# Altium PCB PCB Raspberry PI 3 en adelante.PcbDoc
Units mm, origin at the board's own origin, x right, y up, seen from the top; angles counter-clockwise.
Board outline 66 x 45 mm, 2 copper layers (Top Layer, Bottom Layer); 11 components, 24 nets, 90 pads, 34 vias.
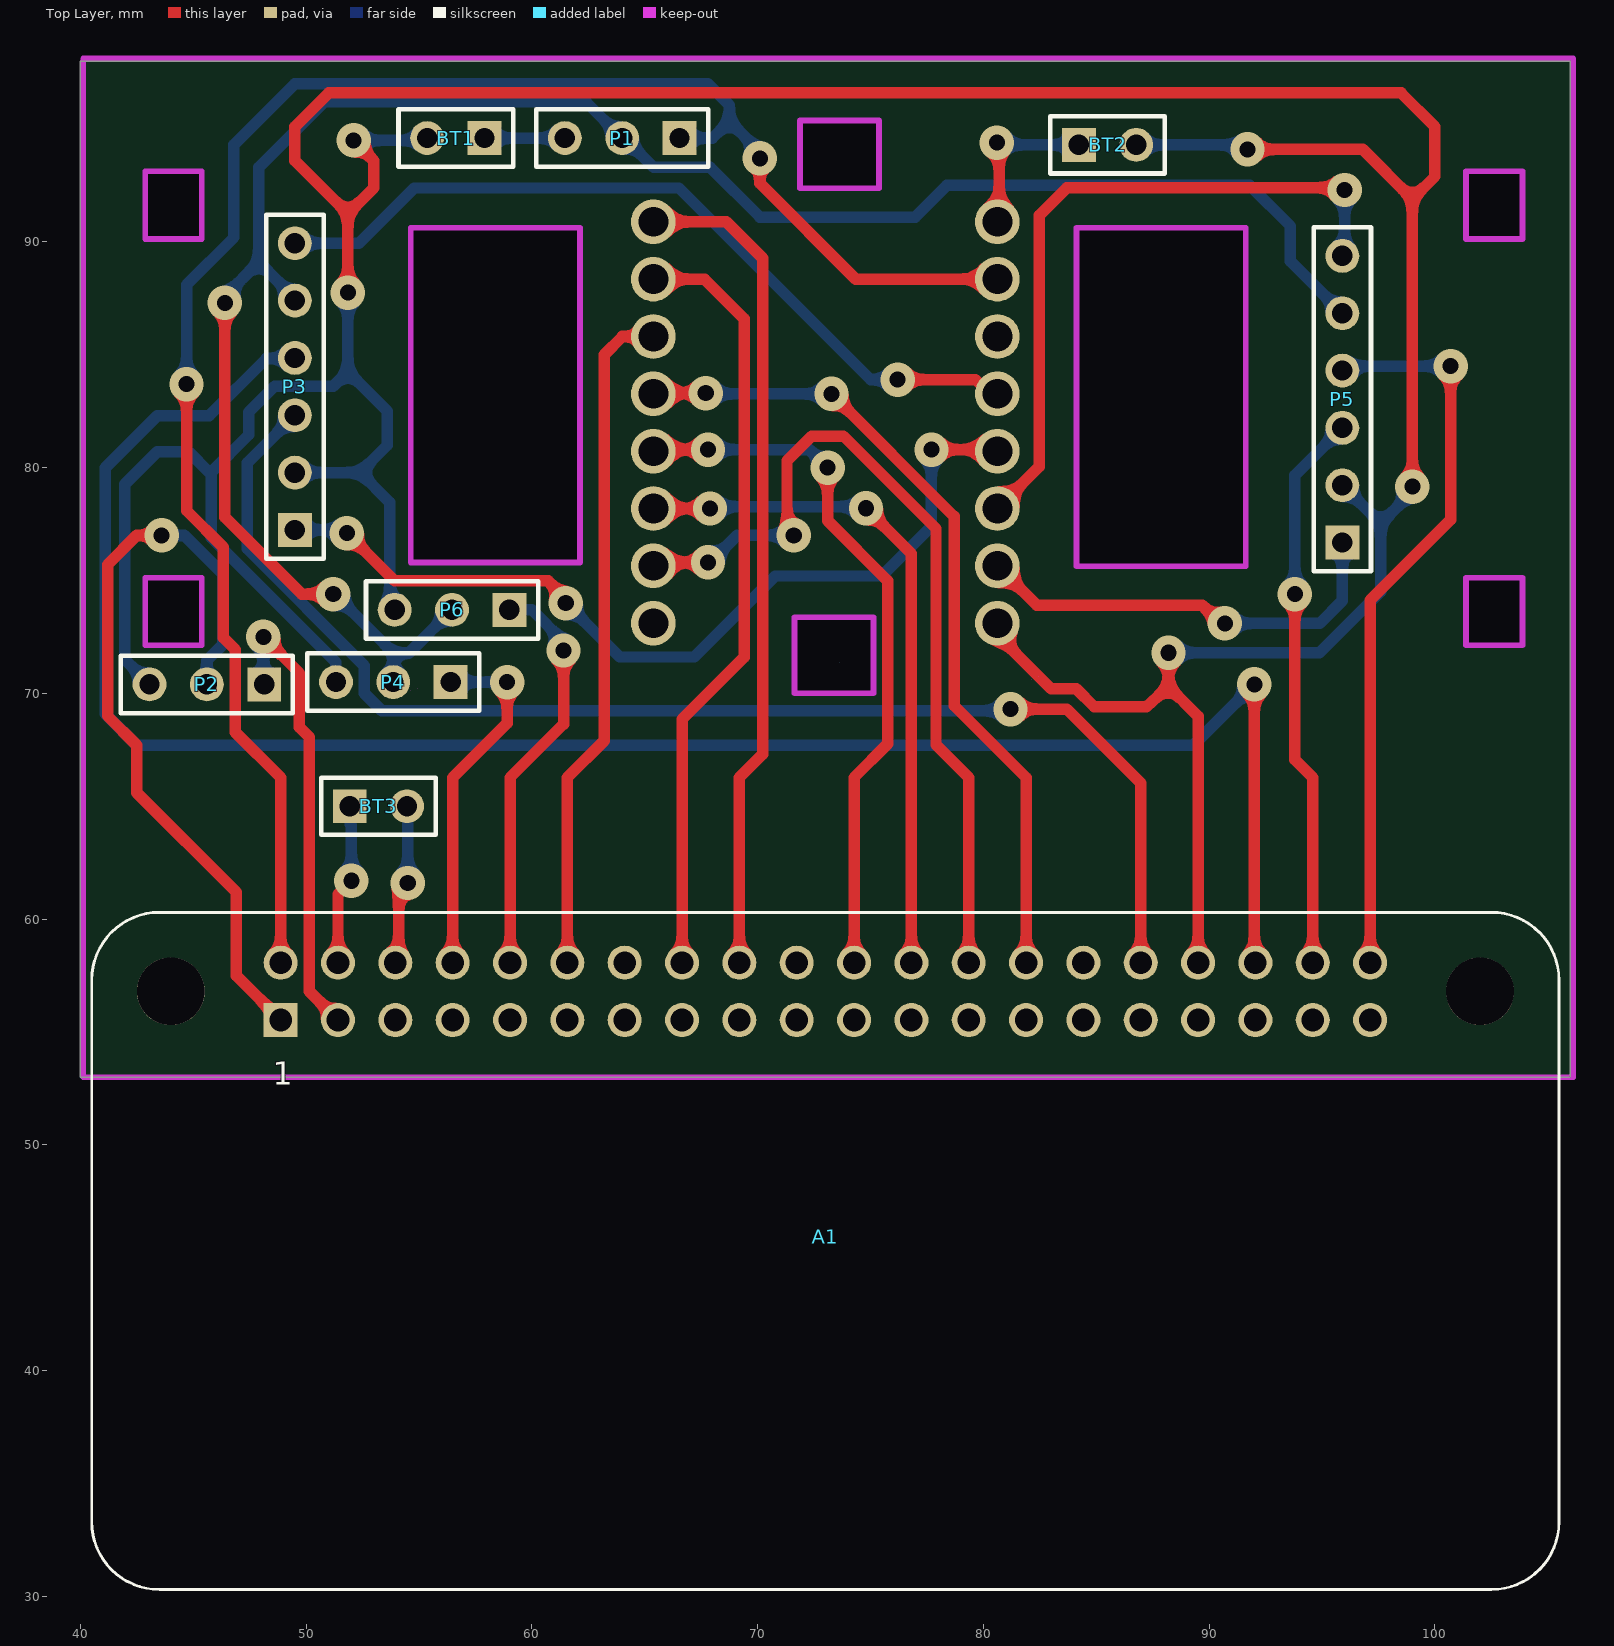
[diagram p0: Top Layer view]
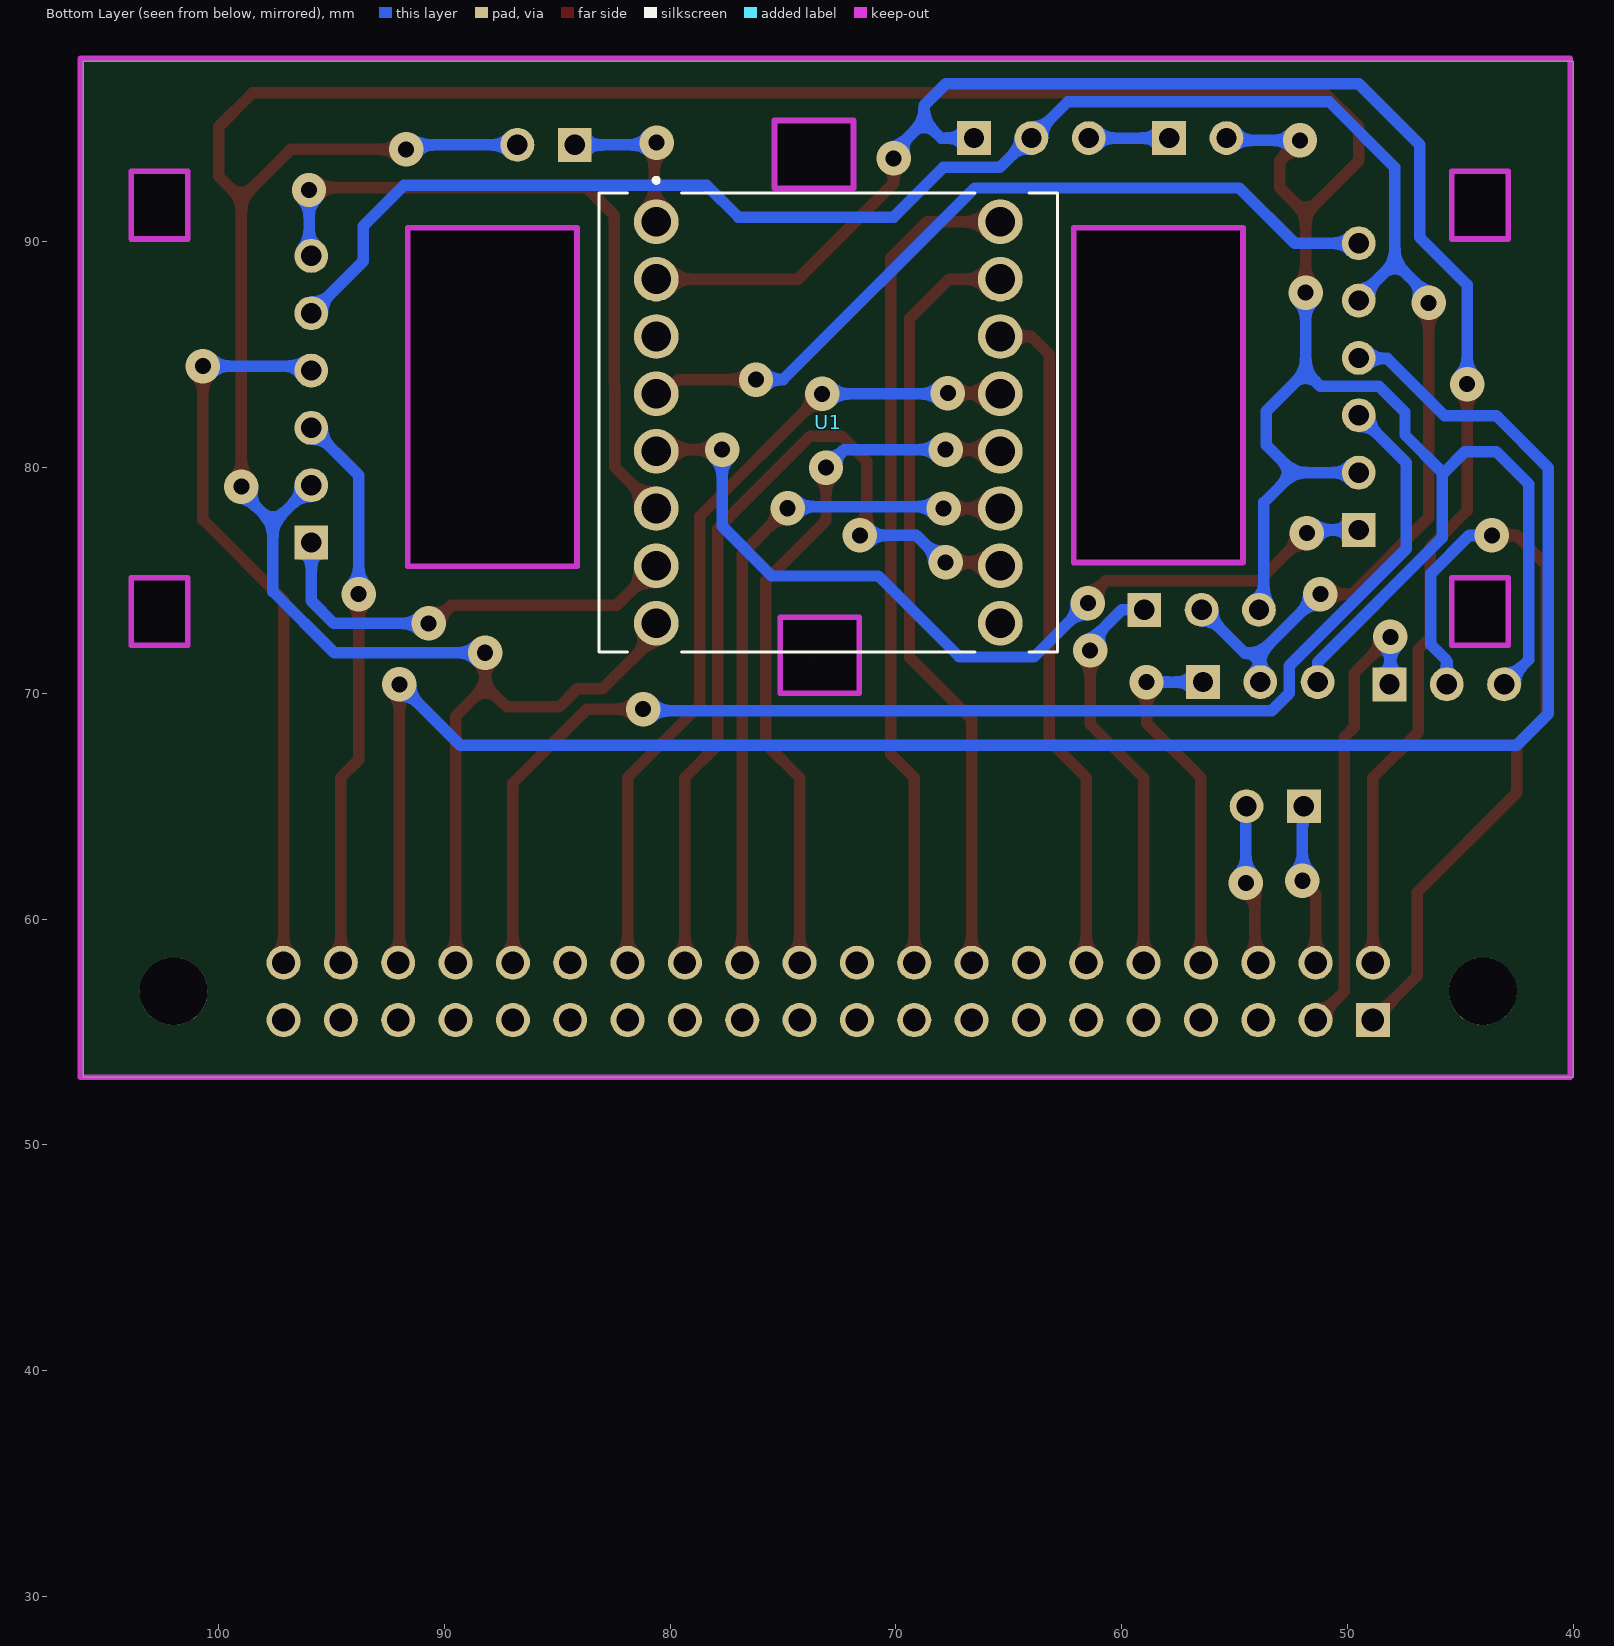
[diagram p1: Bottom Layer view, seen from below]

## Layer stack, top to bottom
Top Solder: solder mask 0.0102, Solder Resist, Dk 3.5
Top Layer: signal copper 0.0356
Dielectric 1: dielectric 0.32, FR-4, Dk 4.8
Bottom Layer: signal copper 0.0356
Bottom Solder: solder mask 0.0102, Solder Resist, Dk 3.5

## Board outline
40,53 106,53 106,98 40,98
cut-out: 54.927,70.227
cut-out: 54.627,70.127
cut-out: 54.627,75.8 54.627,90.627 62.127,90.627 62.127,75.8
cut-out: 84.127,75.627 84.127,90.627 91.627,90.627 91.627,75.627
cut-out: 82.127,70.627
cut-out: 82.427,70.727
cut-out: 71.877,92.377 75.377,92.377 75.377,95.377 71.877,95.377
cut-out: 42.877,90.127 45.377,90.127 45.377,93.127 42.877,93.127
cut-out: 42.877,72.127 45.377,72.127 45.377,75.127 42.877,75.127
cut-out: 101.377,90.127 103.877,90.127 103.877,93.127 101.377,93.127
cut-out: 101.377,72.127 103.877,72.127 103.877,75.127 101.377,75.127
cut-out: 71.627,73.377 75.127,73.377 75.127,70.002 71.627,70.002
cut-out: 73.627,71.377

## Design rules (kind name [scope] priority, off if disabled: settings)
AcuteAngle [All] p1: minimum=9.00000000000000E+0001 checktracksonly=FALSE
Clearance [All] p1: gap=0.254 ignorepadtopadclearanceinfootprint=FALSE except(0: Arc-Hole Track-Hole SMDPad-Hole THPad-Hole Via-Hole Fill-Hole Poly-Hole Region-Hole Text-Hole)
HoleSize [All] p1: absolutevalues=TRUE maxlimit=3 minlimit=0.025 maxpercent=80.000 minpercent=20.000
PolygonConnect [All] p1: connectstyle=Relief reliefconductorwidth=0.254 reliefentries=4 polygonreliefangle="90 Angle" airgapwidth=0.254
RoutingVias [All] p1: holewidth=0.711 width=1.524 viastyle="Through Hole" minholewidth=0.711 minwidth=1.524 maxholewidth=0.711 maxwidth=1.524
SolderMaskExpansion [All] p1: expansion=0.102
Width [All] p1: maxlimit=0.635 minlimit=0.254 preferedwidth=0.508 minimp=50.000000 maximp=50.000000 favimp=50.000000
29 further rules are at their usual default settings.

## Classes and differential pairs
component class Sheet2: A1 BT1 BT2 P1 P2 P3 P4 P5 P6 U1

## Components (designator, comment, footprint, x,y, rotation, side; value= is the part's Value field where it differs from the comment)
A1 "ADA3708" ADA3708_RPI-ZERO 73,56.8 r0 top
BT1 "Battery" BAT-2 56.63,94.6 r180 top
BT2 "Battery" BAT-2 85.5,94.3 r0 top
BT3 "Battery" BAT-2 53.2,65 r0 top (schematic designator BT2)
P1 "Header 3" HDR1X3 66.54,94.6 r180 top
P2 "Header 3" HDR1X3 48.14,70.4 r180 top
P3 "Header 6" HDR1X6 49.5,77.24 r90 top
P4 "Header 3" HDR1X3 56.4,70.5 r180 top
P5 "Header 6" HDR1X6 95.9,76.68 r90 top
P6 "Header 3" HDR1X3 59,73.7 r180 top
U1 "ROB-14450" MODULE_ROB-14450 73,82 r180 bottom

## Footprints (in the part's own frame and the unit in brackets; to place one, negate y for a bottom-side part, rotate by r counter-clockwise, add the part's x,y. Pads: shape width x height; smd on the part's side, far side on the other; paste and mask are expansions set on the pad)
ADA3708_RPI-ZERO [mm]
  rect 1.508x1.508 hole 1: 1(-24.13,-1.27)
  round 1.508 hole 1: 2(-24.13,1.27) 3(-21.59,-1.27) 4(-21.59,1.27) 5(-19.05,-1.27) 6(-19.05,1.27) 7(-16.51,-1.27) 8(-16.51,1.27) 9(-13.97,-1.27) 10(-13.97,1.27) 11(-11.43,-1.27) 12(-11.43,1.27) 13(-8.89,-1.27) 14(-8.89,1.27) 15(-6.35,-1.27) 16(-6.35,1.27) 17(-3.81,-1.27) 18(-3.81,1.27) 19(-1.27,-1.27) 20(-1.27,1.27) 21(1.27,-1.27) 22(1.27,1.27) 23(3.81,-1.27) 24(3.81,1.27) 25(6.35,-1.27) 26(6.35,1.27) 27(8.89,-1.27) 28(8.89,1.27) 29(11.43,-1.27) 30(11.43,1.27) 31(13.97,-1.27) 32(13.97,1.27) 33(16.51,-1.27) 34(16.51,1.27) 35(19.05,-1.27) 36(19.05,1.27) 37(21.59,-1.27) 38(21.59,1.27) 39(24.13,-1.27) 40(24.13,1.27)
  round 0 all layers, no hole: ""(-29,-23) ""(29,-23)
  round 3 hole 3 unplated: ""(-29,0) ""(29,0)
  silkscreen extent -32.5,-26.5 32.5,3.5
BAT-2 [mm] "Battery; 2 Leads"
  rect 1.5x1.5 hole 0.9: 1(-1.27,0)
  round 1.5 hole 0.9: 2(1.27,0)
  silkscreen extent -2.54,-1.27 2.54,1.27
HDR1X3 [mm] "Connector; Header; 3 Position"
  rect 1.5x1.5 hole 0.9: 1(0,0)
  round 1.5 hole 0.9: 2(2.54,0) 3(5.08,0)
  silkscreen extent -1.27,-1.27 6.35,1.27
HDR1X6 [mm] "Connector; Header; 6 Position"
  rect 1.5x1.5 hole 0.9: 1(0,0)
  round 1.5 hole 0.9: 2(2.54,0) 3(5.08,0) 4(7.62,0) 5(10.16,0) 6(12.7,0)
  silkscreen extent -1.27,-1.27 13.97,1.27
MODULE_ROB-14450 [mm]
  round 1.98 hole 1.32: 1(-7.62,8.89) 2(-7.62,6.35) 3(-7.62,3.81) 4(-7.62,1.27) 5(-7.62,-1.27) 6(-7.62,-3.81) 7(-7.62,-6.35) 8(-7.62,-8.89) 9(7.62,-8.89) 10(7.62,-6.35) 11(7.62,-3.81) 12(7.62,-1.27) 13(7.62,1.27) 14(7.62,3.81) 15(7.62,6.35) 16(7.62,8.89)
  silkscreen extent -10.16,-10.16 10.16,10.83, body extent -10.16,-10.16 10.16,10.16, height 5.5

## Part data
A1: "Raspberry Pi Zero WH _Zero W with Headers_", Package=None, Availability=Unavailable, MF="Raspberry Pi", MP=ADA3708, Price=None, SnapEDA_Link=https://www.snapeda.com/parts/ADA3708/Raspberry%20Pi/view-part/2770118/?ref=snap
BT1 BT2 BT3: "Multicell Battery", LatestRevisionDate=17-Jul-2002, LatestRevisionNote="Re-released for DXP Platform.", PackageDescription="Battery; 2 Leads", PackageReference=BAT-2, Published=24-Mar-1999, Publisher="Altium Limited"
P1 P2 P4 P6: "Header, 3-Pin", LatestRevisionDate=17-Jul-2002, LatestRevisionNote="Re-released for DXP Platform.", Publisher="Altium Limited"
P3 P5: "Header, 6-Pin", LatestRevisionDate=17-Jul-2002, LatestRevisionNote="Re-released for DXP Platform.", Publisher="Altium Limited"
U1: "TB6612FNG Motor Controller/Driver Power Management Evaluation Board", Package=None, Availability="In Stock", Check_prices=https://www.snapeda.com/parts/ROB-14450/SparkFun%20Electronics/view-part/2656367/?ref=eda, MF="SparkFun Electronics", MP=ROB-14450, Price=None, SnapEDA_Link=https://www.snapeda.com/parts/ROB-14450/SparkFun%20Electronics/view-part/2656367/?ref=snap

## Via types
v1: diameter 1.524, hole 0.711, Top Layer to Bottom Layer, 34 vias

## Nets (pads, with @x,y where several pads share a name; then routed paths per layer and width w, separated by ;. In a path a pad name is that pad's centre, name@x,y a point inside that pad or via, vN(x,y) a via of type N, cw(c..) or ccw(c..) an arc to the next point about the centre after c; other vN are vias at no path point)
3V: A1.1 P2.2 | length 34.9
  Top Layer w0.508: v1(43.6,77) 42.5,77 41.2,75.7 41.2,69 42.5,67.7 42.5,65.6 46.9,61.2 46.9,57.5 A1.1
  Bottom Layer w0.508: v1(43.6,77) 44.6,77 46.3,75.3 46.3,72.152 45.6,71.452 P2.2
5V: P1.2 P3.5 P4.2 P5.5 P6.2 | length 88.1
  Top Layer w0.508: v1(46.4,87.3) 46.4,77.8 49.8,74.4 v1(51.2,74.4)
  Bottom Layer w0.508: v1(46.4,87.3) 46.4,87.6 47.9,89.1 ; P3.5@49.45,87.55 47.9,89.1 ; v1@51.2,74.379 51.273,74.379 53.885,71.766 ; P4.2 53.885,71.766 ; P6.2 54.539,71.779 53.885,71.766 ; P1.2 63.95,94.65 62.4,96.2 50.8,96.2 47.9,93.3 47.9,89.1 ; P1.2@64,94.7 65.4,93.3 67.9,93.3 70.1,91.1 76.978,91.1 78.378,92.5 91.8,92.5 93.6,90.7 93.6,89.14 P5.5
GND: A1.34 BT1.2 BT2.2 P2.3 P3.2 P4.3 P5.2 P6.3 U1.8 | length 192.1
  Top Layer w0.508: v1(51.85,87.75) 51.85,91.25 ; v1(52.1,94.5) 53,93.6 53,92.4 51.85,91.25 ; U1.8 80.62,72.58 83,70.2 84.118,70.2 84.918,69.4 87.225,69.4 88.2,70.3 ; v1(88.2,71.8) 88.2,70.3 ; A1.34 89.51,68.99 88.2,70.3 ; v1(91.7,94.1) 96.8,94.1 99,91.9 ; v1(99,79.16) 99,91.9 ; 51.85,91.25 49.5,93.6 49.5,95.1 51,96.6 78.1,96.6 98.5,96.6 100,95.1 100,92.9 99,91.9
  Bottom Layer w0.508: P2.3 41.962,71.498 41.962,79.262 43.4,80.7 44.8,80.7 45.7,79.8 ; P3.2 52.38,79.78 ; P4.3 51.32,71.38 45.8,76.9 45.8,79.8 47.45,81.45 47.45,82.45 48.602,83.602 51.202,83.602 51.85,84.25 ; v1(51.85,87.75) 51.85,84.25 ; v1(52.1,94.5) BT1.2@55.36,94.5 ; P6.3 53.7,73.92 53.7,78.46 52.38,79.78 ; BT2.2 91.5,94.3 v1(91.7,94.1) ; v1(88.2,71.8) 94.889,71.8 97.6,74.511 97.6,77.52 ; P5.2 97.6,77.52 ; v1(99,79.16) 99,78.92 97.6,77.52 ; 51.85,84.25 53.6,82.5 53.6,81 52.38,79.78
NetA1_2: A1.2 P1.1 U1.2 | length 81.1
  Top Layer w0.508: v1(44.7,83.7) 44.7,78.1 46.33,76.47 46.33,72.47 46.858,71.942 46.858,68.282 48.87,66.27 A1.2 ; v1(70.1,93.7) 70.1,92.6 74.35,88.35 U1.2
  Bottom Layer w0.508: v1(44.7,83.7) 44.7,88.1 46.8,90.2 46.8,94.3 49.5,97 67.8,97 68.75,96.05 68.75,95.35 ; P1.1 68,94.6 68.75,95.35 ; v1(70.1,93.7) 70.1,94 68.75,95.35
NetA1_8: A1.8 P4.1 | length 15.9
  Top Layer w0.508: A1.8 56.49,66.27 58.9,68.68 v1(58.9,70.5)
  Bottom Layer w0.508: P4.1 57.9,70.5 v1(58.9,70.5)
NetA1_10: A1.10 P6.1 | length 18.2
  Top Layer w0.508: A1.10 59.03,66.27 61.4,68.64 v1(61.4,71.9) v1@61.4,72.3
  Bottom Layer w0.508: P6.1 60,73.7 v1@61.4,72.3
NetA1_12: A1.12 U1.14 | length 30.1
  Top Layer w0.508: A1.12 61.57,66.27 63.2,67.9 63.2,85 64.01,85.81 U1.14
NetA1_16: A1.16 U1.15 | length 34.4
  Top Layer w0.508: U1.15 67.65,88.35 69.4,86.6 69.4,71.6 66.65,68.85 A1.16
NetA1_18: A1.18 U1.16 | length 37.2
  Top Layer w0.508: U1.16 68.61,90.89 70.23,89.27 70.23,67.31 69.19,66.27 A1.18
NetA1_22: A1.22 U1.12 | length 31.6
  Top Layer w0.508: U1.12@65.45,80.8 v1(67.8,80.8) ; v1(73.1,80) 73.1,77.649 75.768,74.981 75.768,67.768 74.27,66.27 A1.22
  Bottom Layer w0.508: v1(67.8,80.8) 72.3,80.8 v1(73.1,80)
NetA1_24: A1.24 U1.11 | length 30.4
  Top Layer w0.508: U1.11 v1(67.89,78.19) ; v1(74.8,78.2) 76.81,76.19 A1.24
  Bottom Layer w0.508: v1(67.89,78.19) 67.97,78.27 74.73,78.27 v1(74.8,78.2)
NetA1_26: A1.26 U1.10 | length 38.8
  Top Layer w0.508: U1.10@65.43,75.6 65.63,75.8 v1(67.8,75.8) ; v1(71.6,77) 71.3,77.3 71.3,80.3 72.4,81.4 73.8,81.4 77.9,77.3 77.9,67.72 79.35,66.27 A1.26
  Bottom Layer w0.508: v1(67.8,75.8) 67.9,75.8 69.1,77 v1(71.6,77)
NetA1_28: A1.28 U1.13 | length 36.6
  Top Layer w0.508: U1.13@65.41,83.3 v1(67.7,83.3) ; v1(73.27,83.27) 78.7,77.84 78.7,69.46 81.89,66.27 A1.28
  Bottom Layer w0.508: v1@67.7,83.27 v1(73.27,83.27)
NetA1_32: A1.32 P3.3 | length 59.4
  Top Layer w0.508: v1(81.2,69.3) 83.7,69.3 86.97,66.03 A1.32
  Bottom Layer w0.508: P3.3 47.4,80.22 47.4,76.404 52.578,71.226 52.578,70.003 53.351,69.23 81.13,69.23 v1(81.2,69.3)
NetA1_36: A1.36 P3.4 | length 86.2
  Top Layer w0.508: A1.36@92,58.07 v1(92,70.4)
  Bottom Layer w0.508: P3.4 49.478,84.838 48.238,84.838 45.7,82.3 43.4,82.3 41.1,80 41.1,69.1 42.5,67.7 89.3,67.7 v1(92,70.4)
NetA1_38: A1.38 P5.3 | length 24.9
  Top Layer w0.508: v1(93.8,74.4) 93.8,67.06 94.59,66.27 A1.38
  Bottom Layer w0.508: v1(93.8,74.4) 93.8,79.66 P5.3
NetA1_40: A1.40 P5.4 | length 32.8
  Top Layer w0.508: A1.40 97.13,74.13 100.7,77.7 v1(100.7,84.5)
  Bottom Layer w0.508: P5.4 96.1,84.5 v1(100.7,84.5)
NetBT1_1: BT1.1 P1.3 | length 3.6
  Bottom Layer w0.508: BT1.1 P1.3
NetBT2_1: BT2.1 U1.1 | length 7
  Top Layer w0.508: U1.1@80.7,90.97 v1@80.7,94.3
  Bottom Layer w0.508: v1@80.6,94.3 BT2.1
  other v1: 80.6,94.4
NetP3_1: P3.1 U1.5 | length 39.6
  Top Layer w0.508: v1(51.8,77.1) 53.919,74.981 60.719,74.981 v1@61.6,74.1 ; v1(77.7,80.8) U1.5@80.62,80.8
  Bottom Layer w0.508: P3.1 51.66,77.24 v1(51.8,77.1) ; v1@61.7,74.4 61.7,73.8 63.888,71.612 67.19,71.612 70.778,75.2 75.5,75.2 77.7,77.4 v1(77.7,80.8)
  other v1: 61.5,74
NetP3_6: P3.6 U1.4 | length 36.1
  Top Layer w0.508: v1(76.2,83.9) 79.65,83.9 U1.4@80.45,83.1
  Bottom Layer w0.508: P3.6 52.34,89.94 54.788,92.388 66.512,92.388 75,83.9 v1(76.2,83.9) ; U1.4@80.45,83.1 U1.4
NetP5_1: P5.1 U1.7 | length 19.3
  Top Layer w0.508: U1.7 82.37,73.9 89.7,73.9 90.5,73.1 v1(90.7,73.1)
  Bottom Layer w0.508: v1(90.7,73.1) 94.9,73.1 95.9,74.1 P5.1
NetP5_6: P5.6 U1.6 | length 30.8
  Top Layer w0.508: U1.6 82.465,80.035 82.481,87.281 82.481,91.181 83.7,92.4 95.8,92.4 v1@96,92.2
  Bottom Layer w0.508: P5.6 96,89.48 v1(96,92.3)
SIGNAL: A1.3 P2.1 | length 20.2
  Top Layer w0.508: v1(48.1,72.5) 49.7,70.9 49.7,68.5 50.132,68.068 50.132,56.808 A1.3
  Bottom Layer w0.508: P2.1@48.1,70.606 v1(48.1,72.5)
pads on no net: A1. A1.4 A1.5 A1.6 A1.7 A1.9 A1.11 A1.13 A1.14 A1.15 A1.17 A1.19 A1.20 A1.21 A1.23 A1.25 A1.27 A1.29 A1.30 A1.31 A1.33 A1.35 A1.37 A1.39 BT3.1 BT3.2 U1.3 U1.9
copper on no net: | length 12.7
  Top Layer w0.508: 51.41,58.07 51.41,61.11 v1(52,61.7) ; 53.95,58.07 54.1,58.22 54.1,61.2 v1(54.5,61.6)
  Bottom Layer w0.508: 51.96,64.2 52,64.16 v1(52,61.7) ; 54.5,64.2 54.5,63.932 54.5,61.9 v1@54.7,61.7

## Keep-outs
Keep-Out Layer:
  lines w0.254: 40.127,53 106.127,53 106.127,98.127 40.127,98.127 40.127,53 ; 42.877,72.127 42.877,75.127 45.377,75.127 45.377,72.127 42.877,72.127 ; 42.877,90.127 42.877,93.127 45.377,93.127 45.377,90.127 42.877,90.127 ; 54.627,75.8 54.627,90.627 62.127,90.627 62.127,75.8 54.627,75.8 ; 71.627,70.002 71.627,73.377 75.127,73.377 75.127,70.002 71.627,70.002 ; 71.877,92.377 71.877,95.377 75.377,95.377 75.377,92.377 71.877,92.377 ; 84.127,75.627 84.127,90.627 91.627,90.627 91.627,75.627 84.127,75.627 ; 101.377,72.127 101.377,75.127 103.877,75.127 103.877,72.127 101.377,72.127 ; 101.377,90.127 101.377,93.127 103.877,93.127 103.877,90.127 101.377,90.127

## Text inside footprints (layer, text, board x,y; h text height)
A1: Top Overlay "1" at 48.527,52.668 h1.02